# EAGLE board versao4.0 (EAGLE 5.01)
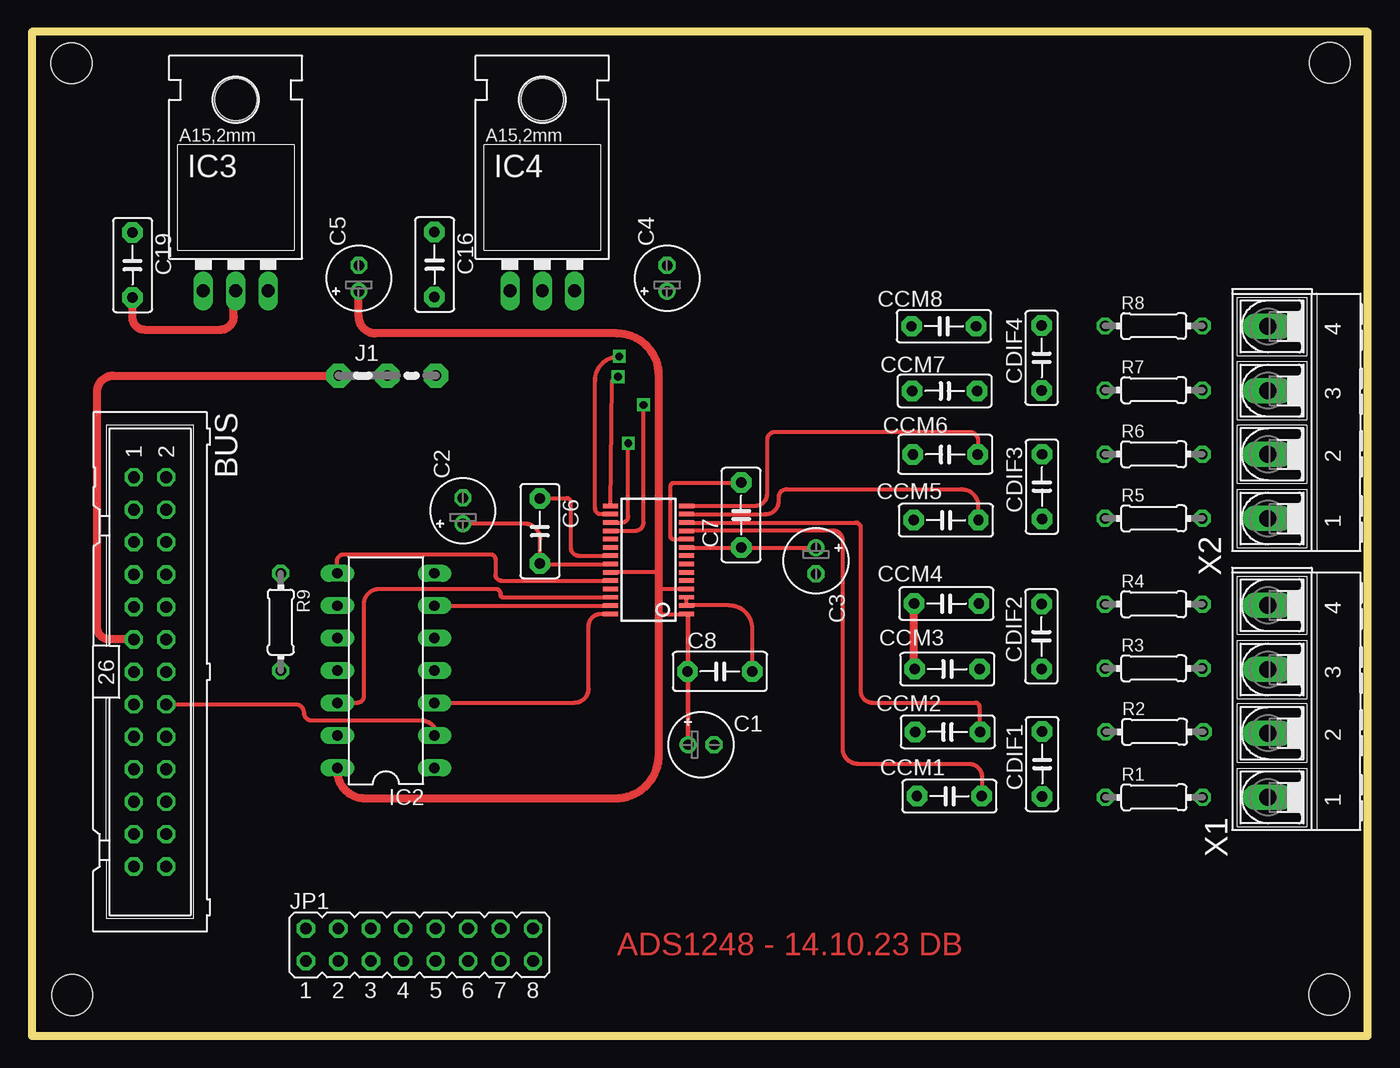
[diagram p0: board, top side]
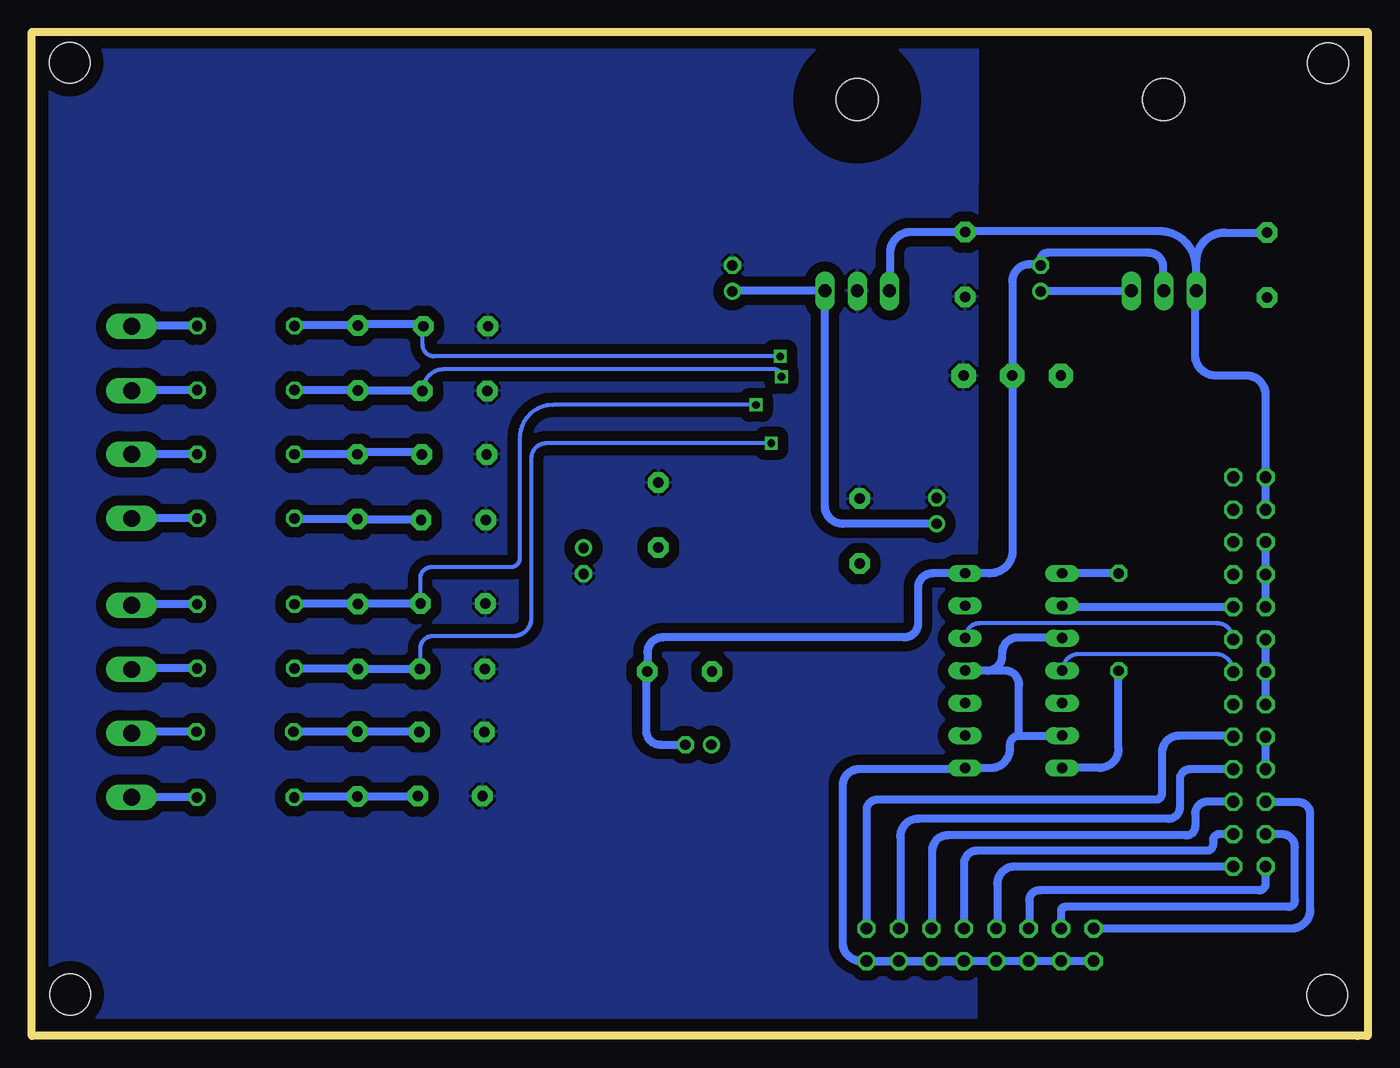
[diagram p1: board, bottom side, seen from below]

Size 104.6 x 78.6 mm. Coordinates in mm from the lower left corner, seen from the top.
Outline: 0.1,0 0.8,0
Outline: 0.8,0 104.6,0 104.6,78.6 0,78.6 0,0 0.8,0
Copper layers (1*16): Top 0.035mm / dielectric 1.5mm / Bottom 0.035mm
Design rules "default": minimum track width 10mil, minimum drill 24mil, track to track 8mil, track to pad 8mil, pad to pad 8mil, via to via 8mil, smd to smd 8mil, copper to edge 40mil, drill to drill 8mil, minimum pad ring 10mil, minimum via ring 8mil, stop-mask expansion 4mil, vias tented up to drill 0mil, thermal gap 10mil
Holes 3.2 mm at 101.65,76.2 3.15,3.2 3.1,76.15 101.6,3.25

## Footprints (pad centres in the part's own frame; a part is rotated, then mirrored left to right if it is on the bottom)
ML26 = drill 0.914 octagon: 1 -15.24,-1.27; 2 -15.24,1.27; 3 -12.7,-1.27; 4 -12.7,1.27; 5 -10.16,-1.27; 6 -10.16,1.27; 7 -7.62,-1.27; 8 -7.62,1.27; 9 -5.08,-1.27; 10 -5.08,1.27; 11 -2.54,-1.27; 12 -2.54,1.27; 13 0,-1.27; 14 0,1.27; 15 2.54,-1.27; 16 2.54,1.27; 17 5.08,-1.27; 18 5.08,1.27; 19 7.62,-1.27; 20 7.62,1.27; 21 10.16,-1.27; 22 10.16,1.27; 23 12.7,-1.27; 24 12.7,1.27; 25 15.24,-1.27; 26 15.24,1.27
E2-5 = drill 0.813 pad 1.27 round: + -1.016,0 | drill 0.813 pad 1.27 octagon: - 1.016,0
C5B3 = drill 0.813 pad 1.6 octagon: 1 -2.54,0; 2 2.54,0
C5B2.5 = drill 0.813 pad 1.6 octagon: 1 -2.54,0; 2 2.54,0
P-TSSOP28-1 = smd 0.35 x 1.2: 1 -4.225,-2.975; 2 -3.575,-2.975; 3 -2.925,-2.975; 4 -2.275,-2.975; 5 -1.625,-2.975; 6 -0.975,-2.975; 7 -0.325,-2.975; 8 0.325,-2.975; 9 0.975,-2.975; 10 1.625,-2.975; 11 2.275,-2.975; 12 2.925,-2.975; 13 3.575,-2.975; 14 4.225,-2.975; 15 4.225,2.975; 16 3.575,2.975; 17 2.925,2.975; 18 2.275,2.975; 19 1.625,2.975; 20 0.975,2.975; 21 0.325,2.975; 22 -0.325,2.975; 23 -0.975,2.975; 24 -1.625,2.975; 25 -2.275,2.975; 26 -2.925,2.975; 27 -3.575,2.975; 28 -4.225,2.975
DIL14 = drill 0.813 long: 1 -7.62,-3.81; 2 -5.08,-3.81; 3 -2.54,-3.81; 4 0,-3.81; 5 2.54,-3.81; 6 5.08,-3.81; 7 7.62,-3.81; 8 7.62,3.81; 9 5.08,3.81; 10 2.54,3.81; 11 0,3.81; 12 -2.54,3.81; 13 -5.08,3.81; 14 -7.62,3.81
78XXL = drill 1.016 long: GND 0,-3.81; IN -2.54,-3.81; OUT 2.54,-3.81 | hole 3.302: 0,11.176
04C = drill 0.813 pad 1.905 octagon: 1 -1.905,0; 2 1.905,0; 3 5.715,0
JP8Q = drill 0.914 octagon: 1 -8.89,-1.27; 2 -8.89,1.27; 3 -6.35,-1.27; 4 -6.35,1.27; 5 -3.81,-1.27; 6 -3.81,1.27; 7 -1.27,-1.27; 8 -1.27,1.27; 9 1.27,-1.27; 10 1.27,1.27; 11 3.81,-1.27; 12 3.81,1.27; 13 6.35,-1.27; 14 6.35,1.27; 15 8.89,-1.27; 16 8.89,1.27
0204/7 = drill 0.813 octagon: 1 -3.81,0; 2 3.81,0
AK500/4-H = drill 1.321 long: 1 -7.518,0; 2 -2.489,0; 3 2.489,0; 4 7.518,0

## Placement (x,y rotation side)
BUS  [ML26]  9.25,28.5 270 top
C1  10u  [E2-5]  52.41,22.8 0 top
C2  10u  [E2-5]  33.75,41.11 90 top
C3  10u  [E2-5]  61.4,37.19 270 top
C4  10u  [E2-5]  49.75,59.31 90 top
C5  10u  [E2-5]  25.6,59.31 90 top
C6  0.1u  [C5B3]  39.78,39.52 270 top
C7  0.1u  [C5B3]  55.54,40.78 90 top
C8  0.1u  [C5B3]  53.88,28.54 0 top
C16  0.1u  [C5B3]  31.53,60.39 270 top
C19  0.1u  [C5B3]  7.88,60.35 270 top
CCM1  1x  [C5B2.5]  71.85,18.77 0 top
CCM2  1x  [C5B2.5]  71.72,23.8 180 top
CCM3  1x  [C5B2.5]  71.68,28.72 0 top
CCM4  1x  [C5B2.5]  71.62,33.84 180 top
CCM5  1x  [C5B2.5]  71.58,40.38 0 top
CCM6  1x  [C5B3]  71.53,45.53 180 top
CCM7  1x  [C5B2.5]  71.48,50.5 0 top
CCM8  1x  [C5B2.5]  71.42,55.56 180 top
CDIF1  10x  [C5B2.5]  79.12,21.28 90 top
CDIF2  10x  [C5B2.5]  79.06,31.28 90 top
CDIF3  10x  [C5B2.5]  79.1,43 90 top
CDIF4  10x  [C5B2.5]  79.08,53.08 90 top
IC1  ADS1248G  [P-TSSOP28-1]  48.29,37.27 90 top
IC2  74LS125N  [DIL14]  27.72,28.6 90 top
IC3  7805  [78XXL]  15.97,62.13 0 top
IC4  7805  [78XXL]  39.97,62.13 0 top
J1  [04C]  25.92,51.69 0 top
JP1  [JP8Q]  30.35,7.13 0 top
R1  [0204/7]  87.87,18.68 0 top
R2  [0204/7]  87.92,23.81 0 top
R3  [0204/7]  87.85,28.78 0 top
R4  [0204/7]  87.85,33.8 0 top
R5  [0204/7]  87.85,40.52 0 top
R6  [0204/7]  87.85,45.54 0 top
R7  [0204/7]  87.85,50.56 0 top
R8  [0204/7]  87.85,55.58 0 top
R9  10k  [0204/7]  19.49,32.4 270 top
X1  [AK500/4-H]  96.8,26.2 90 top
X2  [AK500/4-H]  96.8,48.03 90 top

## Library data of the parts
BUS = con-harting-ml
C1-C5 R1-R9 = resistor
C6-C8 C16 C19 CCM1-CCM8 CDIF1-CDIF4 = capacitor-wima
IC1 = mylib
IC2 = 74xx-us
IC3 IC4 = v-reg
J1 JP1 = jumper
X1 X2 = con-ptr500

## Nets
!SS: BUS.10 IC2.9
+5V: C2.+ C4.+ C6.2 IC1.22 IC4.OUT
+5V/2: C1.+ C5.+ C8.1 IC1.1 IC1.4 IC1.23 IC2.14 IC3.OUT R9.2
+12V: BUS.1 BUS.3 C16.1 C19.1 IC3.IN IC4.IN
-12V: BUS.17 BUS.19
ADDR0: BUS.21 JP1.2
ADDR1: BUS.23 JP1.4
ADDR2: BUS.25 JP1.6
ADDR3: BUS.26 JP1.8
ADDR4: BUS.24 JP1.10
ADDR5: BUS.22 JP1.12
ADDR6: BUS.20 JP1.14
ADDR7: BUS.18 JP1.16
AGND: C2.- C3.- C4.- C6.1 C7.2 C16.2 CCM1.1 CCM2.2 CCM3.1 CCM4.2 CCM5.1 CCM6.2 CCM7.1 CCM8.2 IC1.10 IC1.21 IC4.GND J1.3
DGND: C1.- C5.- C8.2 C19.2 IC1.2 IC1.3 IC2.7 IC3.GND J1.2
MISO: BUS.14 IC2.11
MOSI: BUS.12 IC2.5
N$1: C3.+ C7.1 IC1.9
N$2: CCM1.2 CDIF1.1 IC1.11 R1.1
N$3: CCM2.1 CDIF1.2 IC1.12 R2.1
N$4: R2.2 X1.2
N$5: IC1.28 IC2.3
N$6: R8.2 X2.4
N$7: CCM5.2 CDIF3.1 IC1.13 R5.1
N$8: CCM7.2 CDIF4.1 IC1.15 R7.1
N$9: CCM6.1 CDIF3.2 IC1.14 R6.1
N$10: CCM4.1 CDIF2.2 IC1.18 R4.1
N$11: IC1.27 IC2.6
N$12: IC1.26 IC2.12
N$13: IC1.24 IC2.8 R9.1
N$14: IC2.1 IC2.4 IC2.10 IC2.13 JP1.1 JP1.3 JP1.5 JP1.7 JP1.9 JP1.11 JP1.13 JP1.15
N$15: R1.2 X1.1
N$16: R7.2 X2.3
N$17: R6.2 X2.2
N$18: R5.2 X2.1
N$19: R4.2 X1.4
N$20: R3.2 X1.3
N$23: CCM8.1 CDIF4.2 IC1.16 R8.1
N$24: CCM3.2 CDIF2.1 IC1.17 R3.1
PE: BUS.11 BUS.13 BUS.15 J1.1
SCK: BUS.16 IC2.2
V+: BUS.5 BUS.7 BUS.9

## Tracks (layer width: path | path; a pad name or v marks a point on that pad's centre or on a via)
!SS
  Bottom 0.61: IC2.9 IC2.9 arc90 23.9,33.7 arc-90 23.78,33.58 BUS.10
+5V
  Top 0.305: C6.2 arc-90 39.8,37 | IC1.22 39.85,36.94 arc-90 39.8,37 | 39.8,37 39.8,38.9 arc90 38.6,40.1 33.8,40.1 arc-90 33.6,40.3 arc-90 33.75,40.15 C2.+
  Bottom 0.61: 49.9,58.29 49.9,58.2 | 49.9,58.29 C4.+ | 49.9,58.29 49.9,58.32 IC4.OUT IC4.OUT arc-90 42.5,58.3 42.5,41.5 arc-90 41.09,40.09 C2.+
+5V/2
  Top 0.305: 51.3,33 arc-90 51.35,33.05 IC1.1 | 51.3,33 arc-90 51.34,32.96 C8.1 51.36,28.54 arc-90 51.4,28.5 arc90 51.39,28.49 C1.+ 51.39,32.91 arc90 51.3,33 | 49.1,36.3 49,36.3 arc-90 48.99,36.3 IC1.23 | 49.1,33 51.3,33 | IC1.4 49.1,35 arc-90 49.1,35
  Top 0.61: C5.+ 25.6,56.3 arc90 26.9,55 45.8,55 arc-90 49.1,51.7 49.1,36.3 49.1,35 49.1,33 49.1,22 arc-90 45.7,18.6 26.1,18.6 arc-90 23.9,20.8 arc90 23.91,20.81 IC2.14
  Bottom 0.61: IC3.OUT 25.6,58.32 C5.+ | IC2.14 21.02,20.98 arc-90 19.5,22.5 19.5,28.4 arc-90 19.6,28.5 arc90 19.51,28.59 R9.2
+12V
  Bottom 0.61: C19.1 11.21,62.89 arc-90 13.4,60.7 13.4,58.4 arc-90 13.43,58.37 IC3.IN | IC4.IN IC4.IN arc90 37.4,58.3 37.4,61.3 arc90 35.77,62.93 C16.1 31.57,62.93 arc-90 31.6,62.9 arc90 31.5,63 16.3,63 arc90 13.43,60.13 IC3.IN | BUS.3 7.98,43.58 arc-90 8,43.6 arc-90 7.98,43.62 BUS.1 7.98,50.18 arc-90 9.5,51.7 11.9,51.7 arc90 13.5,53.3 13.5,58.3 arc90 13.48,58.32 IC3.IN
-12V
  Bottom 0.61: 7.98,23.52 arc90 7.9,23.6 arc-90 7.98,23.52 | 7.98,23.52 BUS.17 | BUS.19 7.98,23.52
ADDR0
  Bottom 0.61: JP1.2 6,8.4 arc-90 4.5,9.9 4.5,17.4 arc-90 5.4,18.3 8,18.3 arc-90 7.98,18.32 BUS.21
ADDR1
  Bottom 0.61: BUS.23 6.7,15.8 arc90 5.7,14.8 5.7,10.6 arc90 6.2,10.1 23.7,10.1 arc-90 24,9.8 24,8.3 | 24,8.3 arc90 24.1,8.2 arc-90 24,8.3 | 24,8.3 JP1.4
ADDR2
  Bottom 0.61: BUS.25 7.98,11.92 arc90 8.5,11.4 25.7,11.4 arc-90 26.5,10.6 26.5,8.8 arc90 26.7,8.6 arc90 26.54,8.44 JP1.6
ADDR3
  Bottom 0.61: BUS.26 27.64,13.26 arc-90 29,11.9 29,8.7 arc90 29.2,8.5 arc-90 29.1,8.4 JP1.8
ADDR4
  Bottom 0.61: BUS.24 11.6,15.8 arc-90 12.1,15.3 12.1,15 arc90 12.6,14.5 30.6,14.5 arc-90 31.6,13.5 31.6,8.7 arc90 31.8,8.5 arc-90 31.7,8.4 JP1.10
ADDR5
  Bottom 0.61: BUS.22 12.56,18.34 arc-90 13.5,17.4 13.5,16.4 arc90 14.2,15.7 32.9,15.7 arc-90 34.1,14.5 34.1,8.4 arc90 34.2,8.3 arc-90 34.16,8.34 JP1.12
ADDR6
  Bottom 0.61: BUS.20 13.92,20.88 arc-90 14.7,20.1 14.7,17.9 arc90 15.6,17 35.2,17 arc-90 36.6,15.6 36.6,8.7 arc90 36.8,8.5 arc90 JP1.14
ADDR7
  Bottom 0.61: JP1.16 39.24,17.66 arc90 38.4,18.5 16.6,18.5 arc-90 16.1,19 16.1,22.2 arc90 14.8,23.5 10.5,23.5 arc90 10.4,23.4 arc-90 10.42,23.42 BUS.18
AGND
  Top 0.305: IC1.21 42.8,37.59 arc-90 42.2,38.2 42.2,41.8 arc90 41.9,42.1 39.8,42.1 arc90 39.78,42.08 C6.1 | IC1.10 50.21,38.89 arc-90 50,39.1 50,43 arc-90 50.3,43.3 55.5,43.3 arc-90 55.52,43.32 C7.2
  Top 0.61: CCM3.1 69.14,28.76 arc90 69.1,28.8 arc-90 69.08,28.82 CCM4.2
  pour Bottom (isolate 0.813): 107.4,80.85 106.35,-2.7 30.65,-2.8 30.5,80.45
DGND
  Top 0.305: 51.3,33.7 arc-90 51.27,33.73 IC1.3 IC1.2 51.29,33.69 arc90 51.3,33.7 | C8.2 56.42,31.88 arc90 54.6,33.7 51.3,33.7
  Top 0.61: C19.2 7.88,56.22 arc90 8.8,55.3 14.8,55.3 arc90 15.8,56.3 15.8,57.8 arc-90 16.2,58.2 arc90 16.08,58.32 IC3.GND
  Bottom 0.61: IC3.GND IC3.GND arc90 15.9,58.4 arc90 16,58.5 16,60.2 arc-90 17.1,61.3 25.1,61.3 arc-90 25.6,60.8 C5.- 25.63,60.33 arc90 25.7,60.4 26.5,60.4 arc-90 27.83,59.08 J1.2 27.83,51.78 arc90 27.8,51.8 27.8,38 arc90 29.58,36.22 IC2.7 34.08,36.22 arc-90 35.2,35.1 35.2,32.3 arc90 36.3,31.2 55.2,31.2 arc-90 56.4,30 56.4,28.6 arc-90 56.42,28.58 C8.2 56.42,28.52 arc-90 56.4,28.5 arc-90 56.5,28.4 56.5,23.9 arc-90 55.4,22.8 C1.-
MISO
  Bottom 0.305: BUS.14 arc-90 11.92,29.9 22.6,29.9 arc-90 IC2.11
MOSI
  Bottom 0.305: BUS.12 arc-90 11.78,32.3 30.4,32.3 arc-90 31.5,31.2 arc-90 31.53,31.17 IC2.5
N$1
  Top 0.305: 55.54,38.2 55.6,38.2 | IC1.9 51.37,38.2 55.54,38.2 | C3.+ 55.54,38.2 | 55.54,38.2 C7.1
N$2
  Top 0.305: IC1.11 62.76,39.55 arc-90 63.5,38.8 63.5,22.5 arc90 64.7,21.3 73.4,21.3 arc-90 74.4,20.3 74.4,18.8 arc90 74.39,18.79 CCM1.2
  Bottom 0.61: R1.1 84.08,18.68 arc90 84.1,18.7 arc90 84.06,18.74 CDIF1.1 74.46,18.74 arc-90 74.3,18.9 arc-90 74.39,18.81 CCM1.2
N$3
  Top 0.305: IC1.12 64.5,40.19 arc-90 64.9,39.8 64.9,27 arc90 65.8,26.1 73.9,26.1 arc-90 74.2,25.8 74.2,23.8 arc90 74.3,23.7 arc-90 74.26,23.74 CCM2.1
  Bottom 0.61: R2.1 arc90 84.08,23.82 CDIF1.2 74.12,23.82 arc90 74,23.7 arc-90 74.1,23.8 CCM2.1 | R2.1
N$4
  Bottom 0.61: X1.2 96.81,23.71 arc90 96.9,23.8 arc90 96.89,23.81 R2.2
N$5
  Top 0.305: IC1.28 44.54,33.05 arc90 43.6,32.1 43.6,27.2 arc-90 42.5,26.1 31.7,26.1 arc90 31.6,26 arc90 IC2.3
N$6
  Bottom 0.61: X2.4 96.85,55.55 arc-90 96.9,55.5 arc90 96.82,55.58 R8.2
N$7
  Top 0.305: IC1.13 57.45,40.84 arc90 58.5,41.9 58.5,42.2 arc-90 59.1,42.8 72.8,42.8 arc-90 74.1,41.5 74.1,40.5 arc90 74.2,40.4 arc-90 74.18,40.38 CCM5.2
  Bottom 0.61: R5.1 84.08,40.52 arc-90 84.1,40.5 arc-90 84.06,40.46 CDIF3.1 79.1,40.4 74.12,40.4 CCM5.2
N$8  (via drill 0.6)
  Top 0.305: IC1.15 45.41,51.12 arc-90 v45.9,51.6
  Bottom 0.305: v45.9,51.6 arc-90 46.5,52.2 72.3,52.2 arc-90 74,50.5
  Bottom 0.61: R7.1 83.96,50.56 arc90 83.9,50.5 arc90 83.86,50.54 CDIF4.1 79.08,50.5 CCM7.2 74,50.5 73.9,50.5
N$9
  Top 0.305: IC1.14 56.6,41.5 arc90 57.6,42.5 57.6,46.7 arc-90 58.2,47.3 73.4,47.3 arc-90 74.1,46.6 74.1,45.5 arc-90 CCM6.1
  Bottom 0.61: 84.06,45.54 arc-90 84.1,45.5 arc90 84.06,45.54 | 84.06,45.54 R6.1 | 84.06,45.54 CDIF3.2 79.1,45.7 74.07,45.7 CCM6.1
N$10  (via drill 0.6)
  Top 0.305: IC1.18 47.24,39.55 arc90 47.9,40.2 v47.9,49.4
  Bottom 0.305: v47.9,49.4 63.8,49.4 arc-90 66.4,46.8 66.4,37.4 arc90 67.1,36.7 73.3,36.7 arc-90 74.2,35.8 74.2,33.9 arc-90 74.1,33.8 arc-90 74.14,33.84 CCM4.1
  Bottom 0.61: R4.1 84.04,33.86 arc90 84,33.9 arc-90 83.92,33.82 CDIF2.2 74.28,33.82 arc-90 74.2,33.9 arc90 74.16,33.86 CCM4.1
N$11
  Top 0.305: IC1.27 45.41,33.69 arc-90 45.4,33.7 arc-90 45.38,33.68 IC2.6
N$12
  Top 0.305: IC1.26 36.85,34.34 arc-90 36.7,34.5 36.7,34.6 arc90 36.3,35 27.2,35 arc90 26,33.8 26,26.6 arc-90 25.5,26.1 23.9,26.1 arc-90 23.91,26.09 IC2.12
N$13
  Top 0.305: IC1.24 36.76,35.64 arc-90 36.3,36.1 36.3,37.3 arc90 35.9,37.7 24.4,37.7 arc90 23.9,37.2 23.9,36.1 arc90 23.91,36.11 IC2.8
  Bottom 0.61: IC2.8 23.98,36.22 arc-90 24,36.2 arc90 23.99,36.21 R9.1
N$14
  Bottom 0.61: 24.06,5.86 arc90 24.1,5.9 arc-90 24.06,5.86 | JP1.1 JP1.3 | JP1.3 24.06,5.86 | JP1.5 26.54,5.84 arc-90 26.5,5.8 arc90 26.44,5.86 JP1.3 | 29.26,5.86 arc90 29.3,5.9 arc-90 29.26,5.86 | JP1.5 JP1.7 | JP1.7 29.26,5.86 | JP1.7 31.34,5.86 arc-90 31.6,5.6 arc90 31.62,5.62 JP1.9 31.56,5.86 arc90 31.5,5.8 34.2,5.8 | 34.2,5.8 34.3,5.8 arc90 34.4,5.9 arc-90 34.36,5.86 JP1.11 34.16,5.84 arc90 34.2,5.8 | 34.2,5.8 36.6,5.8 arc90 36.8,6 arc90 36.7,5.9 JP1.13 36.74,5.86 arc-90 36.8,5.8 39.6,5.8 arc90 39.54,5.86 JP1.15 | JP1.5 39.66,5.86 arc90 41.1,7.3 41.1,19.6 arc90 39.8,20.9 31.6,20.9 arc90 31.5,20.8 arc90 31.53,20.83 IC2.1 29.52,20.98 arc-90 28,22.5 28,22.8 arc90 27.3,23.5 | IC2.13 23.98,23.52 arc-90 24,23.5 27.3,23.5 | 29.8,28.6 IC2.4 | 29.8,28.6 arc-90 28.6,29.8 28.6,30 arc90 27.4,31.2 24.1,31.2 arc90 24,31.1 arc90 23.96,31.14 IC2.10 | 29.8,28.6 28.4,28.6 arc90 27.3,27.5 27.3,23.5
N$15
  Bottom 0.61: X1.1 96.8,18.6 arc-90 96.7,18.5 arc90 96.52,18.68 R1.2
N$16
  Bottom 0.61: X2.3 96.72,50.52 arc90 96.7,50.5 arc90 96.64,50.56 R7.2
N$17
  Bottom 0.61: X2.2 96.8,45.5 arc90 96.76,45.54 R6.2
N$18
  Bottom 0.61: X2.1 X2.1 arc90 96.9,40.4 arc90 96.78,40.52 R5.2
N$19
  Bottom 0.61: X1.4 96.78,33.72 arc-90 96.7,33.8 R4.2
N$20
  Bottom 0.61: X1.3 96.99,28.69 arc90 97,28.7 arc90 96.92,28.78 R3.2
N$23  (via drill 0.6)
  Top 0.305: IC1.16 44.55,40.84 arc-90 44.1,41.3 44.1,51.3 arc-90 v46,53.2
  Bottom 0.305: v46,53.2 73.1,53.2 arc90 74,54.1 74,55.5 arc-90 74.1,55.6 arc-90 74.06,55.56 CCM8.1
  Bottom 0.61: R8.1 83.88,55.58 arc90 83.8,55.5 arc90 83.68,55.62 CDIF4.2 79.08,55.7 73.96,55.7 CCM8.1
N$24  (via drill 0.6)
  Top 0.305: IC1.17 46.2,40.19 arc90 46.7,40.7 v46.7,46.4
  Bottom 0.305: v46.7,46.4 64.3,46.4 arc-90 65.5,45.2 65.5,32.7 arc90 66.9,31.3 73.2,31.3 arc-90 74.2,30.3 74.2,28.5 arc90 74.22,28.52 CCM3.2
  Bottom 0.61: R3.1 84.04,28.74 arc-90 84,28.7 arc90 83.96,28.74 CDIF2.1 arc90 79,28.8 arc-90 78.92,28.72 CCM3.2
PE
  Top 0.61: BUS.11 6.06,31.04 arc-90 5.1,32 5.1,50.4 arc-90 6.4,51.7 J1.1 arc90 24.1,51.8 arc90 24.02,51.72 J1.1
  Bottom 0.61: BUS.15 7.98,28.28 arc-90 8,28.3 arc-90 7.98,28.32 BUS.13 7.98,30.82 arc90 7.8,31 arc-90 7.84,31.04 BUS.11
SCK
  Top 0.305: BUS.16 20.64,25.96 arc-90 21.3,25.3 arc90 21.9,24.7 30.5,24.7 arc-90 31.7,23.5 arc90 31.68,23.52 IC2.2
V+
  Bottom 0.61: BUS.9 7.98,36.08 arc-90 8.1,36.2 arc-90 8.02,36.12 BUS.7 7.98,38.48 arc-90 8.1,38.6 arc90 8.04,38.66 BUS.5

## Text on the board
Top: ADS1248 - 14.10.23 DB